# EAGLE board Task-3-Circuit (EAGLE 9.7.0)

Size 172.57 x 138.28 mm. Coordinates in mm from the lower left corner, seen from the top.
Outline: 0,0 172.57,0 172.57,138.28 0,138.28 0,0
Copper layers (1*16): Top 0.035mm / dielectric 1.5mm / Bottom 0.035mm
Design rules "default": minimum track width 6mil, minimum drill 0.35mm, track to track 6mil, track to pad 6mil, pad to pad 6mil, via to via 6mil, smd to smd 6mil, copper to edge 40mil, drill to drill 6mil, minimum pad ring 10mil, minimum via ring 8mil, stop-mask expansion 4mil, vias tented up to drill 0mil, thermal gap 10mil

## Footprints (pad centres in the part's own frame; a part is rotated, then mirrored left to right if it is on the bottom)
RESAD1016W63L850D250B = drill 0.83 pad 1.43: 1 -5.08,0; 2 5.08,0
GL5528 = drill 0.8 pad 1.4: 1 -1.702,0; 2 1.702,0
ARDUINO-UNO-R3-SHIELD = drill 1.016 pad 1.88: 3.3V 24.13,-2.54; 5V 24.13,0; A0 24.13,12.7; A1 24.13,15.24; A2 24.13,17.78; A3 24.13,20.32; A4 24.13,22.86; A5 24.13,25.4; AREF -24.13,-13.97; D2 -24.13,20.32; D3 -24.13,17.78; D4 -24.13,15.24; D5 -24.13,12.7; D6 -24.13,10.16; D7 -24.13,7.62; D8 -24.13,3.81; D9 -24.13,1.27; D10 -24.13,-1.27; D11 -24.13,-3.81; D12 -24.13,-6.35; D13 -24.13,-8.89; GND@0 24.13,2.54; GND@1 24.13,5.08; GND@2 -24.13,-11.43; IOREF 24.13,-7.62; NC 24.13,-10.16; RES 24.13,-5.08; RX -24.13,25.4; SCL -24.13,-19.05; SDA -24.13,-16.51; TX -24.13,22.86; VIN 24.13,7.62
JHD-162A = drill 1.016 long: 1 -19.05,0; 2 -16.51,0; 3 -13.97,0; 4 -11.43,0; 5 -8.89,0; 6 -6.35,0; 7 -3.81,0; 8 -1.27,0; 9 1.27,0; 10 3.81,0; 11 6.35,0; 12 8.89,0; 13 11.43,0; 14 13.97,0; 15 16.51,0; 16 19.05,0

## Placement (x,y rotation side)
R1  500  [RESAD1016W63L850D250B]  73.03,55.19 90 top
R3  500  [RESAD1016W63L850D250B]  6.99,57.73 90 top
R4  PHOTOCELL_GL5528  [GL5528]  5.71,70.43 0 top
UARDUINO_MAIN  ARDUINO-UNO-R3-SHIELD  [ARDUINO-UNO-R3-SHIELD]  138.05,108.43 270 top
ULCD_MAIN  LCD-16X2JHD-162A  [JHD-162A]  56.77,36.63 0 top

## Library data of the parts
R1 R3 R4 UARDUINO_MAIN ULCD_MAIN = Tinkercad

## Nets
UARDUINO_MAIN_5V: R1.1 R4.1 UARDUINO_MAIN.5V ULCD_MAIN.2
UARDUINO_MAIN_A0: UARDUINO_MAIN.A0 ULCD_MAIN.3
UARDUINO_MAIN_A1: R3.2 R4.2 UARDUINO_MAIN.A1
UARDUINO_MAIN_D2: UARDUINO_MAIN.D2 ULCD_MAIN.4
UARDUINO_MAIN_D3: UARDUINO_MAIN.D3 ULCD_MAIN.6
UARDUINO_MAIN_D4: UARDUINO_MAIN.D4 ULCD_MAIN.11
UARDUINO_MAIN_D5: UARDUINO_MAIN.D5 ULCD_MAIN.12
UARDUINO_MAIN_D6: UARDUINO_MAIN.D6 ULCD_MAIN.13
UARDUINO_MAIN_D7: UARDUINO_MAIN.D7 ULCD_MAIN.14
UARDUINO_MAIN_GND: R3.1 UARDUINO_MAIN.GND@0 UARDUINO_MAIN.GND@1 UARDUINO_MAIN.GND@2 ULCD_MAIN.1 ULCD_MAIN.5 ULCD_MAIN.16
ULCD_MAIN_LED+: R1.2 ULCD_MAIN.15

## Tracks (layer width: path | path; a pad name or v marks a point on that pad's centre or on a via)
UARDUINO_MAIN_5V  (3 unrouted)
UARDUINO_MAIN_A0  (1 unrouted)
UARDUINO_MAIN_A1  (2 unrouted)
UARDUINO_MAIN_D2  (1 unrouted)
UARDUINO_MAIN_D3  (1 unrouted)
UARDUINO_MAIN_D4  (1 unrouted)
UARDUINO_MAIN_D5  (1 unrouted)
UARDUINO_MAIN_D6  (1 unrouted)
UARDUINO_MAIN_D7  (1 unrouted)
UARDUINO_MAIN_GND  (6 unrouted)
ULCD_MAIN_LED+  (1 unrouted)